# EAGLE board TMR01 (EAGLE 9.2.0)
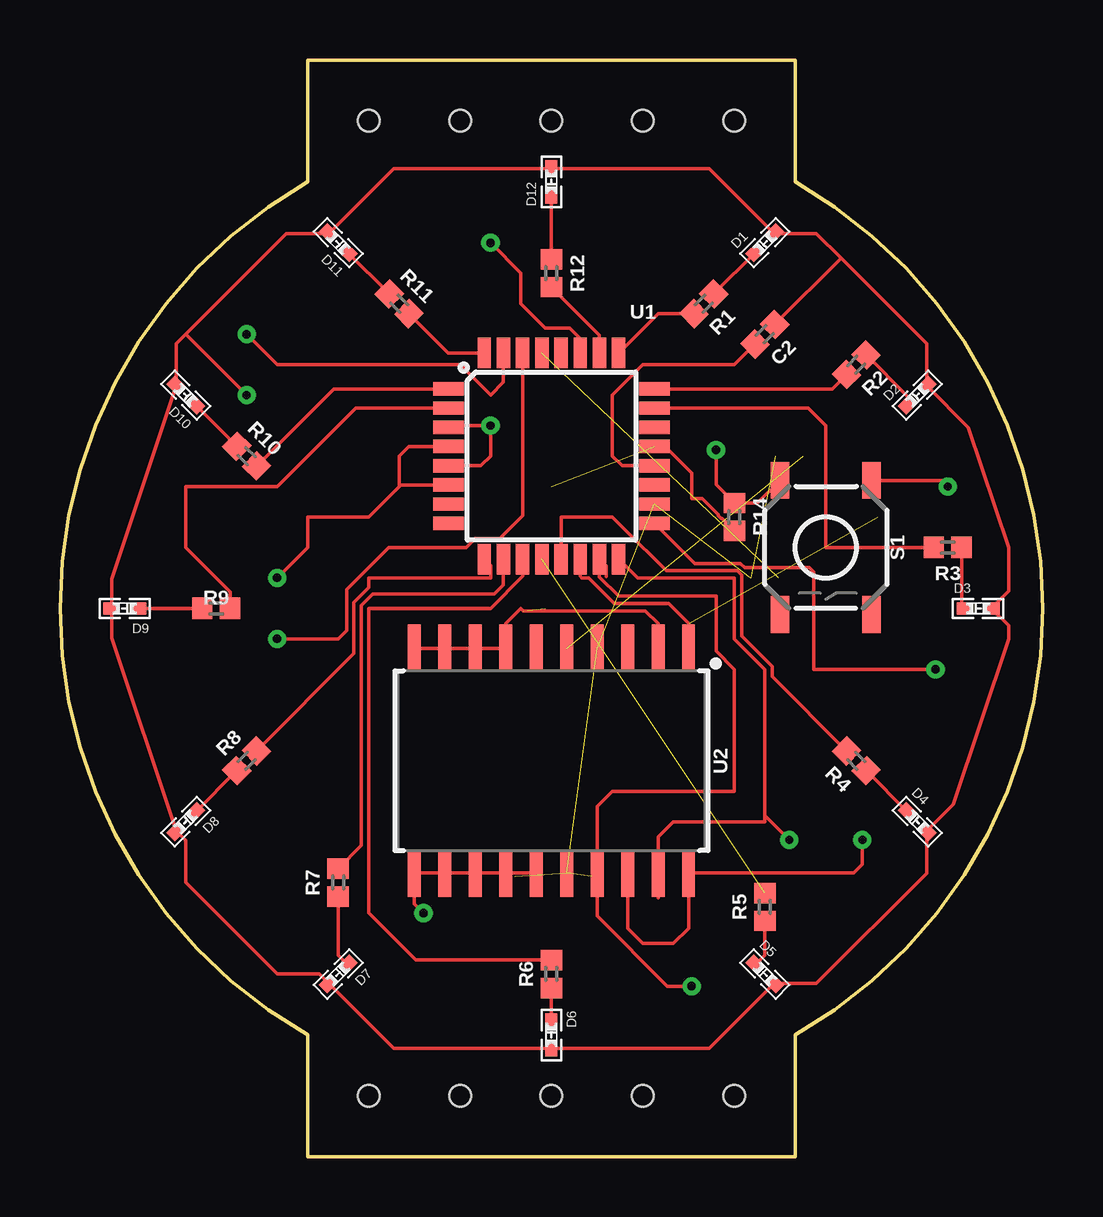
[diagram p0: board, top side]
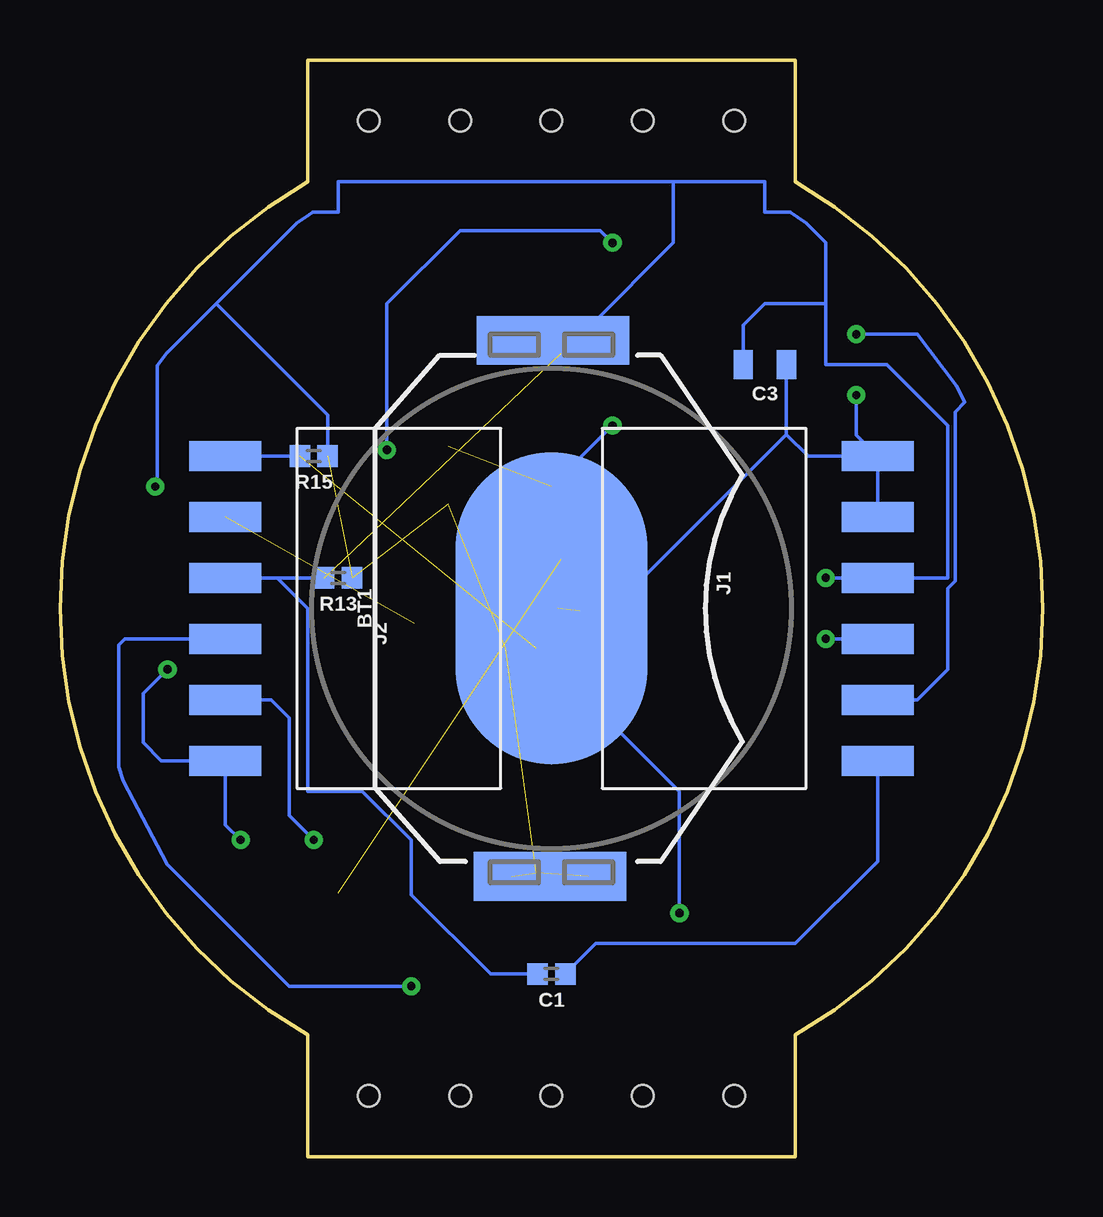
[diagram p1: board, bottom side, seen from below]

Size 40.96 x 45.72 mm. Coordinates in mm from the lower left corner, seen from the top.
Outline: 30.64,45.72 30.64,40.64 arc-121 30.64,5.08 30.64,0 10.32,0 10.32,5.08 arc-121 10.32,40.64 10.32,45.72 30.64,45.72
Copper layers (1*16): Top 0.035mm / dielectric 1.5mm / Bottom 0.035mm
Design rules "default": minimum track width 6mil, minimum drill 0.35mm, track to track 6mil, track to pad 6mil, pad to pad 6mil, via to via 6mil, smd to smd 6mil, copper to edge 40mil, drill to drill 6mil, minimum pad ring 10mil, minimum via ring 8mil, stop-mask expansion 4mil, vias tented up to drill 0mil, thermal gap 10mil
Holes 0.9 mm at 12.86,2.54 16.67,2.54 20.48,2.54 24.29,2.54 28.1,2.54 12.86,43.18 16.67,43.18 20.48,43.18 24.29,43.18 28.1,43.18

## Footprints (pad centres in the part's own frame; a part is rotated, then mirrored left to right if it is on the bottom)
BATTCON_20MM_4LEGS = smd 13 x 8: NEGATIVE 0,0 | smd 2.032 x 3.175: POSITIVE@1 -11.176,1.651; POSITIVE@2 -11.176,-1.524; POSITIVE@3 11.176,1.524; POSITIVE@4 11.176,-1.651
0402 = smd 0.85 x 0.9: 1 -0.58,0; 2 0.58,0
0805 = smd 0.8 x 1.2: 1 -0.9,0; 2 0.9,0
0402.LED = smd 0.7 x 0.5: P$1 -0.55,0; P$2 0.55,0
1X06-SMD-FEMALE = smd 1.25 x 3: 1 6.35,3.425; 2 3.81,3.425; 3 1.27,3.425; 4 -1.27,3.425; 5 -3.81,3.425; 6 -6.35,3.425
TACTILE_SWITCH_SMD_5.2MM = smd 1.524 x 0.762: 1 -2.794,1.905; 2 2.794,1.905; 3 -2.794,-1.905; 4 2.794,-1.905
TQFP32-08 = smd 1.27 x 0.559: 1 -4.293,2.8; 2 -4.293,2; 3 -4.293,1.2; 4 -4.293,0.4; 5 -4.293,-0.4; 6 -4.293,-1.2; 7 -4.293,-2; 8 -4.293,-2.8; 17 4.293,-2.8; 18 4.293,-2; 19 4.293,-1.2; 20 4.293,-0.4; 21 4.293,0.4; 22 4.293,1.2; 23 4.293,2; 24 4.293,2.8 | smd 0.559 x 1.27: 9 -2.8,-4.293; 10 -2,-4.293; 11 -1.2,-4.293; 12 -0.4,-4.293; 13 0.4,-4.293; 14 1.2,-4.293; 15 2,-4.293; 16 2.8,-4.293; 25 2.8,4.293; 26 2,4.293; 27 1.2,4.293; 28 0.4,4.293; 29 -0.4,4.293; 30 -1.2,4.293; 31 -2,4.293; 32 -2.8,4.293
SO20-0.3 = smd 0.53 x 1.98: 1 -5.715,-4.685; 2 -4.445,-4.685; 3 -3.175,-4.685; 4 -1.905,-4.685; 5 -0.635,-4.685; 6 0.635,-4.685; 7 1.905,-4.685; 8 3.175,-4.685; 9 4.445,-4.685; 10 5.715,-4.685; 11 5.715,4.685; 12 4.445,4.685; 13 3.175,4.685; 14 1.905,4.685; 15 0.635,4.685; 16 -0.635,4.685; 17 -1.905,4.685; 18 -3.175,4.685; 19 -4.445,4.685; 20 -5.715,4.685

## Placement (x,y rotation side)
BT1  [BATTCON_20MM_4LEGS]  20.48,22.86 90 bottom
C1  0.1uF  [0402]  20.48,7.62 180 bottom
C2  0.1uF  [0402]  29.37,34.29 225 top
C3  10uF  [0805]  11.59,33.02 180 bottom
D1  [0402.LED]  29.37,38.1 45 top
D2  [0402.LED]  35.72,31.75 45 top
D3  [0402.LED]  38.26,22.86 0 top
D4  [0402.LED]  35.72,13.97 315 top
D5  [0402.LED]  29.37,7.62 315 top
D6  [0402.LED]  20.48,5.08 270 top
D7  [0402.LED]  11.59,7.62 225 top
D8  [0402.LED]  5.24,13.97 225 top
D9  [0402.LED]  2.7,22.86 180 top
D10  [0402.LED]  5.24,31.75 135 top
D11  [0402.LED]  11.59,38.1 135 top
D12  [0402.LED]  20.48,40.64 90 top
FRAME1  FRAME-LETTER  [CREATIVE_COMMONS]  2.7,-7.62 0 top  (outside the outline)
J1  [1X06-SMD-FEMALE]  10.32,22.86 270 bottom
J2  [1X06-SMD-FEMALE]  30.64,22.86 90 bottom
R1  200  [0402]  26.83,35.56 225 top
R2  200  [0402]  33.18,33.02 225 top
R3  200  [0402]  36.99,25.4 180 top
R4  200  [0402]  33.18,16.51 135 top
R5  200  [0402]  29.37,10.41 90 top
R6  200  [0402]  20.48,7.62 90 top
R7  200  [0402]  11.59,11.43 90 top
R8  200  [0402]  7.78,16.51 45 top
R9  200  [0402]  6.51,22.86 0 top
R10  200  [0402]  7.78,29.21 315 top
R11  200  [0402]  14.13,35.56 315 top
R12  200  [0402]  20.48,36.83 270 top
R13  10k  [0402]  29.37,24.13 180 bottom
R14  10k  [0402]  28.1,26.67 270 top
R15  10k  [0402]  30.38,29.21 180 bottom
S1  MOMENTARY-SWITCH-SPST-SMD-5.2MM  [TACTILE_SWITCH_SMD_5.2MM]  31.91,25.4 270 top
U1  ATMEGA328P_TQFP  [TQFP32-08]  20.48,29.21 0 top
U2  DS3234  [SO20-0.3]  20.48,16.51 180 top

## Library data of the parts
BT1 = SparkFun-Batteries; PROD_ID: BATT-10373; SF_SKU: PRT-11892
C1 C2 = SparkFun-Capacitors; PROD_ID: CAP-12416
C3 = SparkFun-Capacitors; PROD_ID: CAP-11330
D1-D12 = standardparts
FRAME1 = SparkFun-Aesthetics
J1 J2 = SparkFun-Connectors; PROD_ID: CONN-09668
R1-R15 = SparkFun-Resistors
S1 = SparkFun-Switches; PROD_ID: SWCH-08247; SF_SKU: COM-08720
U1 = SparkFun-IC-Microcontroller; PROD_ID: IC-09069
U2 = SparkFun-Clocks; PROD_ID: IC-10016; SF_ID: COM-10079

## Nets
D1: R11.2 U1.32
D2: R10.2 U1.1
D3: R9.2 U1.2
D4: R8.2 U1.9
D5: R7.2 U1.10
D6: R6.2 U1.11
D7: R5.2 U1.12
D8: R4.2 U1.13
D9: R3.2 U1.23
D10: R2.2 U1.24
D11: R1.2 U1.25
D12: R12.2 U1.26
DTR: C1.1 J1.1
GND: BT1.NEGATIVE C2.1 C3.1 D1.P$2 D2.P$2 D3.P$2 D4.P$2 D5.P$2 D6.P$2 D7.P$2 D8.P$2 D9.P$2 D10.P$2 D11.P$2 D12.P$2 J1.5 J1.6 R14.2 U1.3 U1.5 U1.21 U2.2 U2.7 U2.8 U2.9 U2.10 U2.11 U2.12 U2.13 U2.14 U2.15
MISO: J2.5 U1.16 U2.19
MOSI: J2.4 U1.15 U2.17
N$1: D8.P$1 R8.1
N$2: D7.P$1 R7.1
N$3: D6.P$1 R6.1
N$4: D5.P$1 R5.1
N$5: D4.P$1 R4.1
N$6: D3.P$1 R3.1
N$7: D2.P$1 R2.1
N$8: D1.P$1 R1.1
N$17: C2.2 U1.20
N$18: D9.P$1 R9.1
N$20: D10.P$1 R10.1
N$22: D11.P$1 R11.1
N$24: D12.P$1 R12.1
PUSH: R14.1 S1.3 U1.27
RST: C1.2 J2.3 R13.2 U1.29
RX: J1.3 U1.30
SCK: J2.6 U1.17 U2.18 U2.20
SQW: J2.1 R15.2 U2.5
SS: J2.2 U1.14 U2.1
TX: J1.2 U1.31
VCC: BT1.POSITIVE@1 BT1.POSITIVE@2 BT1.POSITIVE@3 BT1.POSITIVE@4 C3.2 J1.4 R13.1 R15.1 S1.1 U1.4 U1.6 U1.18 U2.4 U2.16

## Tracks (layer width: path | path; a pad name or v marks a point on that pad's centre or on a via)
D1
  Top 0.152: R11.2 16.19,33.5 U1.32
D2
  Top 0.152: R10.2 11.4,32.01 U1.1
D3
  Top 0.152: R9.2 7.09,23.55 5.24,25.4 5.24,27.94 9.05,27.94 12.32,31.21 U1.2
D4
  Top 0.152: R8.2 12.25,20.98 12.25,22.86 12.25,23.11 12.86,23.72 12.86,24.13 17.94,24.13 17.94,24.66 U1.9
D5
  Top 0.152: R7.2 12.55,12.97 12.55,22.99 13.02,23.46 18.1,23.46 18.48,23.83 U1.10
D6
  Top 0.152: U1.11 19.28,24.2 17.94,22.86 12.86,22.86 12.86,10.16 14,9.02 14.13,8.89 14.82,8.2 R6.2
D7  (1 unrouted)
D8
  Top 0.152: 23.02,26.67 | R4.2 29.67,20.02 29.67,20.45 28.4,21.72 28.4,24.26 28.22,24.44 25.25,24.44 24.47,25.22 24.29,25.4 23.02,26.67 | U1.13 20.88,26.67 23.02,26.67
D9
  Top 0.152: R3.2 31.91,25.4 31.91,30.48 31.18,31.21 U1.23
D10
  Top 0.152: R2.2 32.17,32.01 U1.24
D11
  Top 0.152: R1.2 24.93,35.15 U1.25
D12
  Top 0.152: R12.2 22.48,34.25 U1.26
DTR
  Bottom 0.152: C1.1 18.63,8.89 10.32,8.89 6.89,12.31 J1.1
GND  (via drill 0.35)  (2 unrouted)
  Top 0.152: U2.15 U2.14 U2.13 U2.12 U2.11 14.76,10.54 v15.14,10.16 | 32.54,37.47 31.52,38.49 D1.P$2 27.06,41.19 D12.P$2 13.9,41.19 D11.P$2 9.44,38.49 5.24,34.29 | 32.54,37.47 36.11,33.9 D2.P$2 37.85,30.39 39.53,25.4 39.53,23.58 D3.P$2 39.53,22.14 39.53,21.59 37.21,14.69 D4.P$2 36.11,11.82 31.52,7.23 D5.P$2 27.06,4.53 D6.P$2 13.9,4.53 D7.P$2 10.81,7.62 9.05,7.62 5.24,11.43 5.24,13.19 D8.P$2 2.15,21.63 D9.P$2 2.15,24.09 D10.P$2 4.85,33.9 5.24,34.29 | U2.10 U2.9 U2.8 U2.7 18.57,22.23 19.21,22.86 19.31,22.76 24.39,22.76 24.92,22.23 U2.2 | v7.78,31.75 5.24,34.29 | C2.1 32.54,37.47 | R14.2 27.59,26.6 27.55,26.6 27.42,26.73 27.42,26.77 26.76,27.43 26.32,27.43 26.32,28.5 25.21,29.61 U1.21 | U1.5 17.54,28.81 17.94,29.21 v17.94,30.48 16.26,30.48 U1.3
  Bottom 0.152: C3.1 10.69,30.11 | 10.69,30.11 17.94,22.86 20.22,22.86 | 20.22,22.86 BT1.NEGATIVE 20.48,27.94 v17.94,30.48 | J1.5 J1.6 | J1.6 9.79,29.21 10.69,30.11 | J1.6 7.78,30.09 v7.78,31.75 | v15.14,10.16 15.14,15.24 20.22,20.32 20.22,22.86
MISO  (via drill 0.35)
  Top 0.152: 24.92,10.79 U2.19 24.92,13.33 25.56,13.97 29.37,13.97 29.37,14.22 | 29.37,14.22 29.37,20.32 28.1,21.59 28.1,24.13 24.07,24.13 U1.16 | 29.37,14.22 v30.38,13.21
  Bottom 0.152: v30.38,13.21 31.4,14.22 31.4,18.29 32.16,19.05 J2.5
MOSI  (via drill 0.35)
  Top 0.152: 22.77,24.19 22.77,24.62 U1.15 22.48,24.16 23.27,23.37 27.34,23.37 27.34,21.08 28.1,20.32 28.1,15.24 23.02,15.24 22.38,14.6 U2.17 22.38,10.03 25.3,7.11 v26.32,7.11
  Bottom 0.152: v26.32,7.11 31.4,7.11 36.48,12.19 38.32,15.67 38.51,16.26 38.51,21.34 38.26,21.59 J2.4
N$1
  Top 0.152: D8.P$1 R8.1
N$2
  Top 0.152: D7.P$1 11.59,8.4 R7.1
N$3
  Top 0.152: D6.P$1 R6.1
N$4
  Top 0.152: D5.P$1 29.37,8.4 R5.1
N$5
  Top 0.152: D4.P$1 R4.1
N$6
  Top 0.152: D3.P$1 37.57,23 R3.1
N$7
  Top 0.152: D2.P$1 35.33,31.69 R2.1
N$8
  Top 0.152: D1.P$1 R1.1
N$17
  Top 0.152: C2.2 28.1,33.02 24.29,33.02 23.02,31.75 23.02,29.21 23.42,28.81 U1.20
N$18
  Top 0.152: D9.P$1 R9.1
N$20
  Top 0.152: D10.P$1 R10.1
N$22
  Top 0.152: D11.P$1 R11.1
N$24
  Top 0.152: D12.P$1 R12.1
PUSH  (via drill 0.35)
  Top 0.152: v17.94,38.1 19.21,36.83 19.21,35.56 20.22,34.54 21.24,34.54 21.68,34.11 U1.27 21.75,33.57 | 29.75,27.94 S1.3 29.06,27.25 R14.1 27.34,28.01 v27.34,29.46
  Bottom 0.152: v27.34,29.46 27.34,35.56 24.29,38.61 18.45,38.61 v17.94,38.1
RST  (1 unrouted)
  Bottom 0.152: C1.2 23.02,7.62 26.32,10.92 26.32,13.21 28.35,15.24 30.64,15.24 30.64,22.86 31.91,24.13 | 31.91,24.13 J2.3 | R13.2 31.91,24.13
RX  (via drill 0.35)
  Top 0.152: U1.30 19.28,26.74 18.32,25.78 17.3,25.78 16.92,25.4 13.7,25.4 11.94,23.65 11.94,21.95 11.59,21.59 v9.05,21.59
  Bottom 0.152: v9.05,21.59 J1.3
SCK  (via drill 0.35)
  Top 0.152: U2.18 23.65,9.53 24.29,8.89 25.56,8.89 26.19,9.53 U2.20 33.07,11.83 33.43,12.19 v33.43,13.21 | U1.17 26.44,24.74 28.35,24.74 28.53,24.56 31.22,24.56 31.4,24.38 31.4,20.32 v36.48,20.32
  Bottom 0.152: v33.43,13.21 34.06,13.84 J2.6 36.73,16.51 37.5,17.27 37.5,19.3 v36.48,20.32
SQW  (1 unrouted)
  Bottom 0.152: J2.1 R15.2
SS  (1 unrouted)
  Top 0.152: U2.1 26.19,22.23 25.36,23.06 23.1,23.06 22.03,24.13 21.75,24.13 21.68,24.2 U1.14
TX  (via drill 0.35)
  Top 0.152: U1.31 18.48,32.29 17.94,31.75 16.67,33.02 9.05,33.02 v7.78,34.29
  Bottom 0.152: v7.78,34.29 5.24,34.29 3.61,32.14 3.25,31.46 3.66,31.05 3.66,24 3.97,23.7 3.97,20.32 5.24,19.05 J1.2
VCC  (via drill 0.35)  (6 unrouted)
  Top 0.152: S1.1 36.73,28.19 v36.99,27.94 | U1.6 14.2,28.01 14.13,27.94 | 14.13,27.94 14.13,29.21 14.53,29.61 U1.4 | 14.13,27.94 12.86,26.67 10.32,26.67 10.32,25.4 v9.05,24.13
  Bottom 0.152: C3.2 12.49,34.66 11.59,35.56 9.05,35.56 | 9.05,35.56 9.05,38.1 9.87,38.92 10.52,39.37 11.59,39.37 11.59,40.64 15.4,40.64 | 34.45,35.56 31.09,38.92 30.57,39.27 30.43,39.37 29.37,39.37 29.37,40.64 15.4,40.64 | 34.45,35.56 36.5,33.51 36.9,32.98 36.9,28.02 v36.99,27.94 | R15.1 29.8,30.92 34.45,35.56 | 9.05,35.56 9.05,33.02 6.51,33.02 3.97,30.48 3.97,24.13 J1.4 v9.05,24.13 | BT1.POSITIVE@3 BT1.POSITIVE@4 18.83,34.67 15.4,38.1 15.4,40.64